# EAGLE board Flipdot_Driver_home (EAGLE 9.2.2)
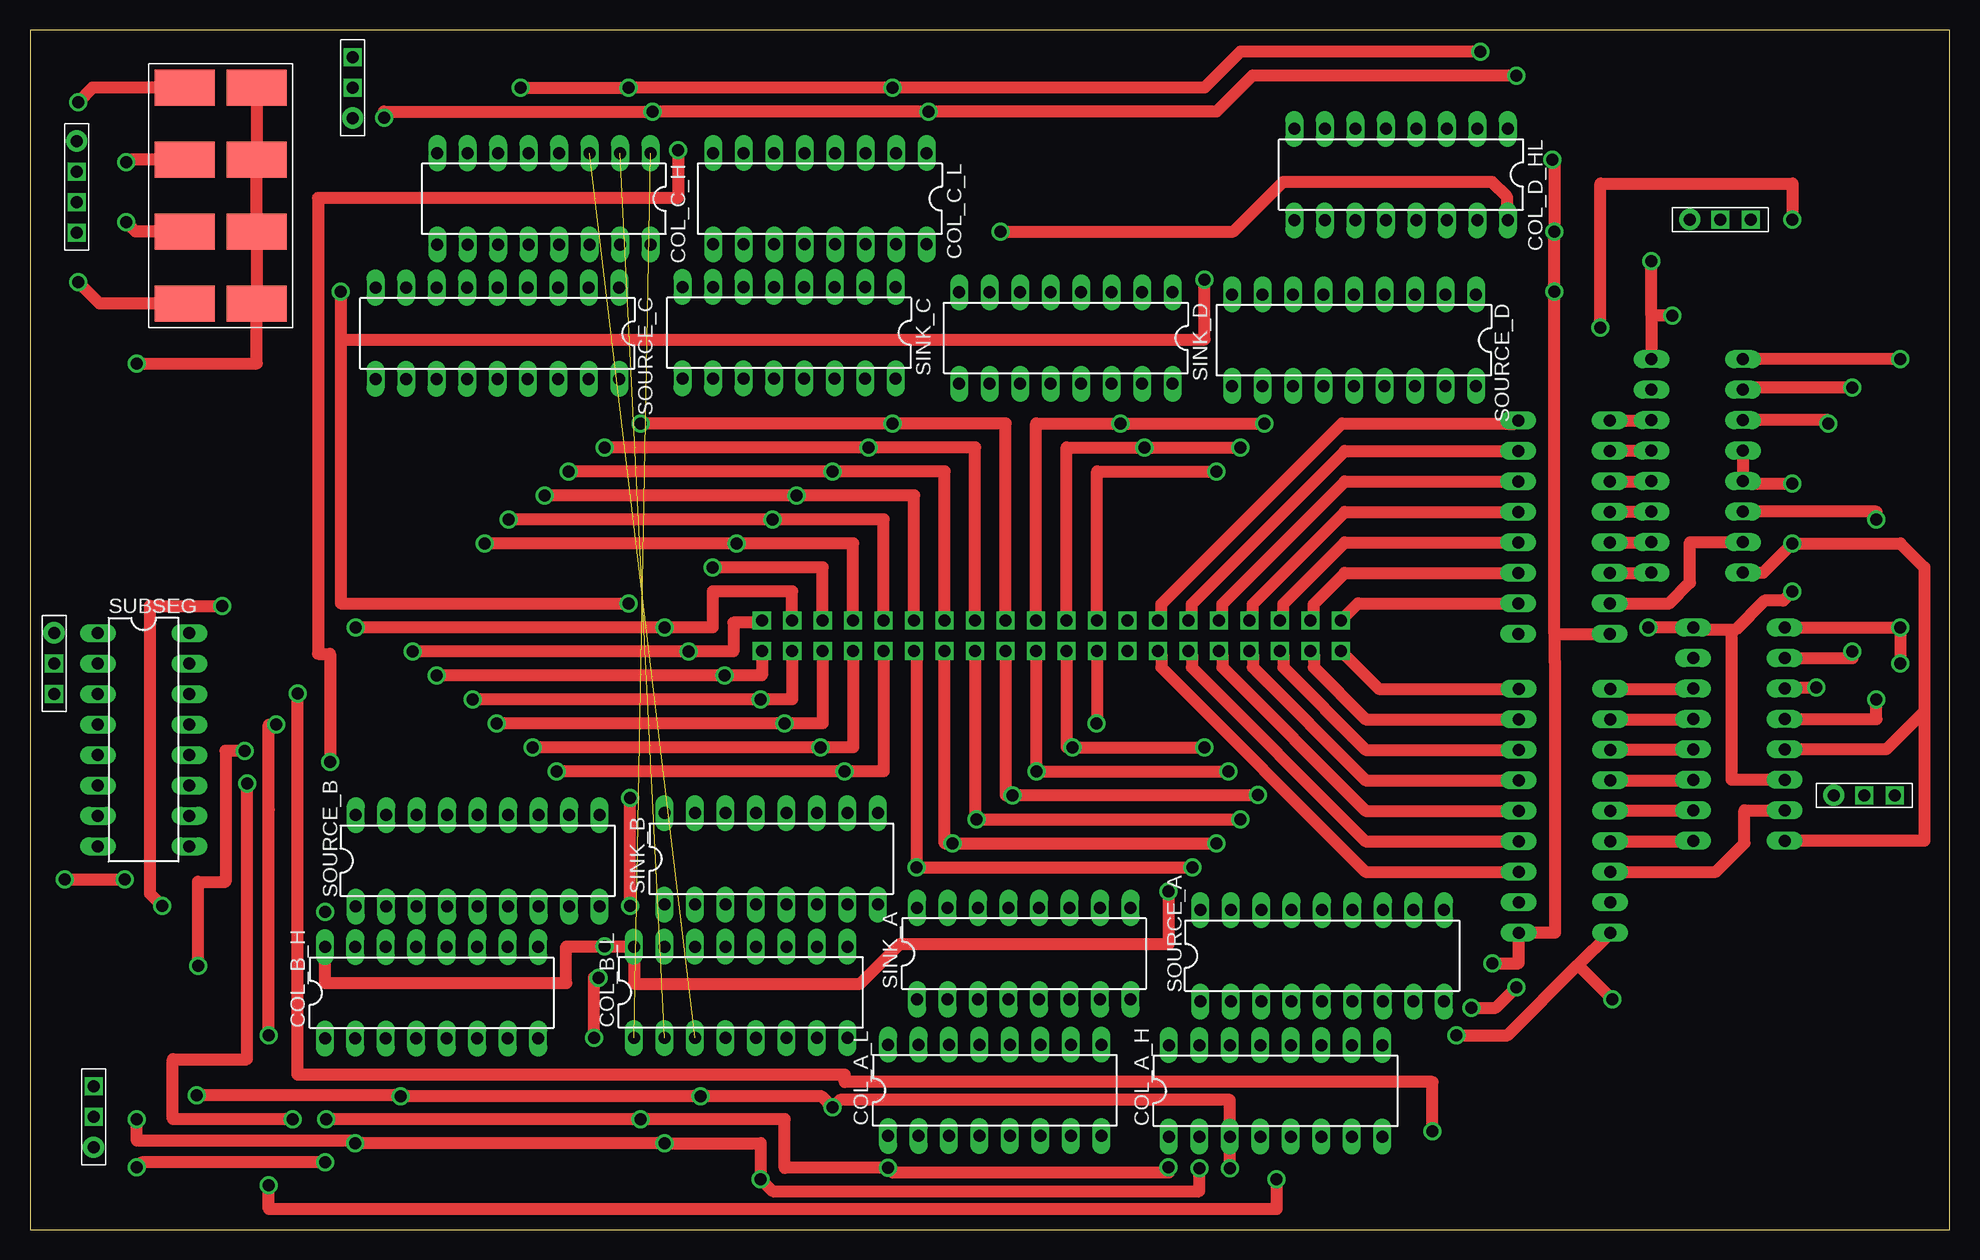
[diagram p0: board, top side]
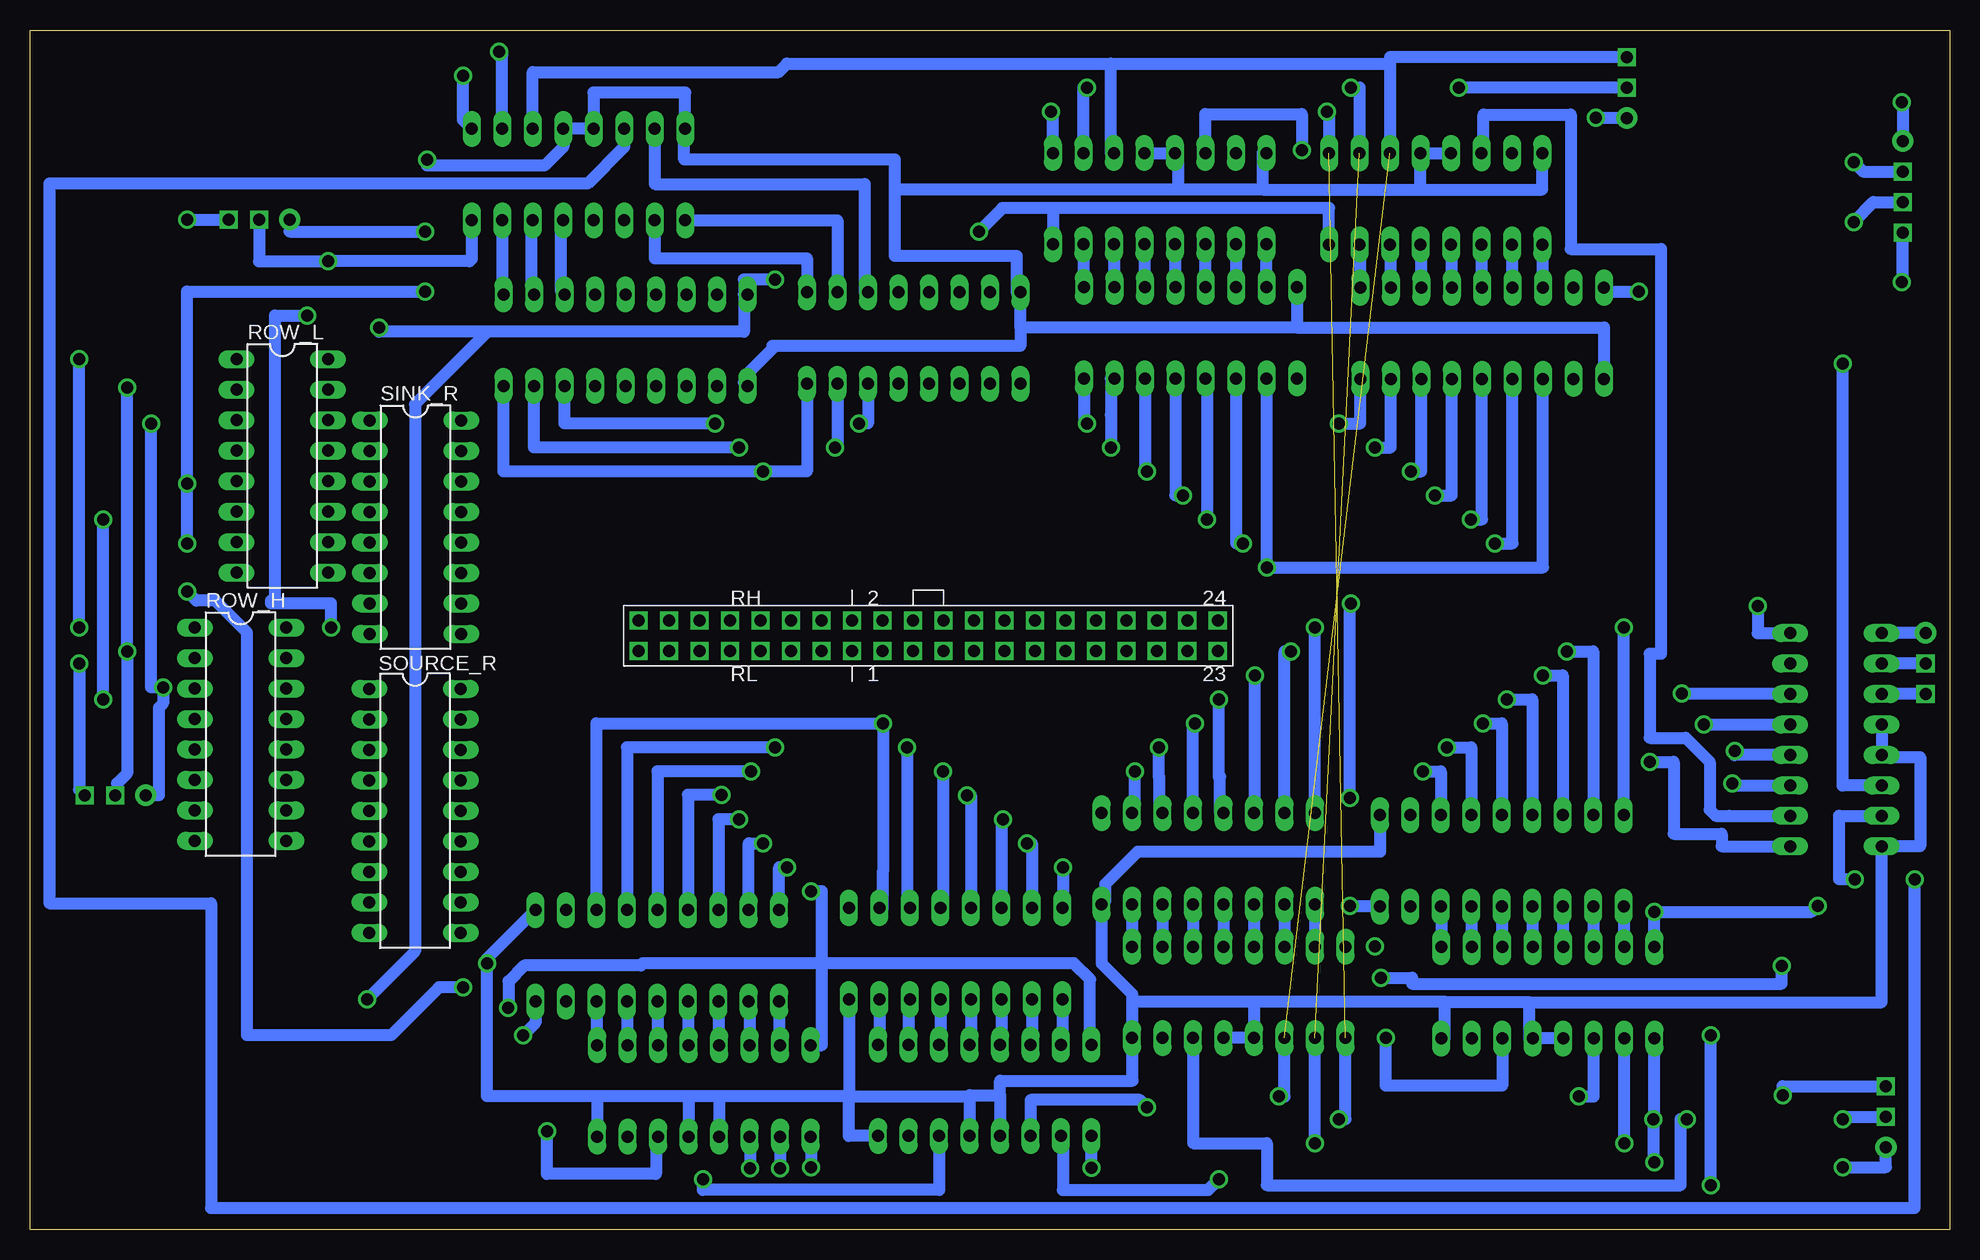
[diagram p1: board, bottom side, seen from below]

Size 160 x 100 mm. Coordinates in mm from the lower left corner, seen from the top.
Outline: 0,0 160,0 160,100 0,100 0,0
Copper layers (1*16): Top 0.035mm / dielectric 1.5mm / Bottom 0.035mm
Design rules "default": minimum track width 0.6mm, minimum drill 1mm, track to track 0.5mm, track to pad 1mm, pad to pad 0.3mm, via to via 1mm, smd to smd 6mil, copper to edge 40mil, drill to drill 1mm, minimum pad ring 10mil, minimum via ring 8mil, stop-mask expansion 4mil, vias tented up to drill 0mil, thermal gap 10mil

## Footprints (pad centres in the part's own frame; a part is rotated, then mirrored left to right if it is on the bottom)
DIL16 = drill 1 long: 1 -8.89,-3.81; 2 -6.35,-3.81; 3 -3.81,-3.81; 4 -1.27,-3.81; 5 1.27,-3.81; 6 3.81,-3.81; 7 6.35,-3.81; 8 8.89,-3.81; 9 8.89,3.81; 10 6.35,3.81; 11 3.81,3.81; 12 1.27,3.81; 13 -1.27,3.81; 14 -3.81,3.81; 15 -6.35,3.81; 16 -8.89,3.81
DIL18 = drill 1 long: 1 -10.16,-3.81; 2 -7.62,-3.81; 3 -5.08,-3.81; 4 -2.54,-3.81; 5 0,-3.81; 6 2.54,-3.81; 7 5.08,-3.81; 8 7.62,-3.81; 9 10.16,-3.81; 10 10.16,3.81; 11 7.62,3.81; 12 5.08,3.81; 13 2.54,3.81; 14 0,3.81; 15 -2.54,3.81; 16 -5.08,3.81; 17 -7.62,3.81; 18 -10.16,3.81
HEADER_40 = drill 1 square: C1 -2.54,-2.54; C2 -2.54,0; C3 0,-2.54; C4 0,0; C5 2.54,-2.54; C6 2.54,0; C7 5.08,-2.54; C8 5.08,0; C9 7.62,-2.54; C10 7.62,0; C11 10.16,-2.54; C12 10.16,0; C13 12.7,-2.54; C14 12.7,0; C15 15.24,-2.54; C16 15.24,0; C17 17.78,-2.54; C18 17.78,0; C19 20.32,-2.54; C20 20.32,0; C21 22.86,-2.54; C22 22.86,0; C23 25.4,-2.54; C24 25.4,0; NC1 -5.08,0; NC2 -5.08,-2.54; R1H -7.62,-2.54; R1L -7.62,0; R2H -10.16,-2.54; R2L -10.16,0; R3H -12.7,-2.54; R3L -12.7,0; R4H -15.24,-2.54; R4L -15.24,0; R5H -17.78,-2.54; R5L -17.78,0; R6H -20.32,-2.54; R6L -20.32,0; R7H -22.86,-2.54; R7L -22.86,0
3_PIN = drill 1 pad 1.778: P$1 -2.54,0 | drill 1 square: P$2 0,0; P$3 2.54,0
JUMPER = smd 3 x 5: S1 -9,-3; S2 -3,-3; S3 3,-3; S4 9,-3; X1 -9,3; X2 -3,3; X3 3,3; X4 9,3
4_PIN = drill 1 pad 1.778: P$1 -2.54,0 | drill 1 square: P$2 0,0; P$3 2.54,0; P$4 5.08,0

## Placement (x,y rotation side)
COL_A_H  74HC238  [DIL16]  103.82,11.55 0 top
COL_A_L  74HC238  [DIL16]  80.41,11.6 0 top
COL_B_H  74HC238  [DIL16]  33.47,19.74 0 top
COL_B_L  74HC238  [DIL16]  59.24,19.77 0 top
COL_C_H  74HC238  [DIL16]  42.83,85.92 180 top
COL_C_L  74HC238  [DIL16]  65.84,85.94 180 top
COL_D_HL  74HC238  [DIL16]  114.28,87.95 180 top
ROW_H  74HC238  [DIL16]  142.44,41.29 270 bottom
ROW_L  74HC238  [DIL16]  138.97,63.65 270 bottom
SINK_A  ULN2003A  [DIL16]  82.85,23 0 top
SINK_B  ULN2003A  [DIL16]  61.78,30.9 0 top
SINK_C  ULN2003A  [DIL16]  63.27,74.76 180 top
SINK_D  ULN2003A  [DIL16]  86.34,74.32 180 top
SINK_R  ULN2003A  [DIL16]  127.87,58.55 270 bottom
SOURCE_A  UDN2981A  [DIL18]  107.7,22.82 0 top
SOURCE_B  UDN2981A  [DIL18]  37.32,30.74 0 top
SOURCE_C  UDN2981A  [DIL18]  38.96,74.71 180 top
SOURCE_D  UDN2981A  [DIL18]  110.36,74.14 180 top
SOURCE_R  UDN2981A  [DIL18]  127.91,34.91 270 bottom
SUBSEG  74HC238  [DIL16]  9.47,40.83 270 top
U$1  HEADER_40  [HEADER_40]  86.4,50.77 0 bottom
U$2  3_PIN  [3_PIN]  5.3,9.4 90 top
U$3  3_PIN  [3_PIN]  2,47.2 270 top
U$4  3_PIN  [3_PIN]  152.9,36.2 0 top
U$5  3_PIN  [3_PIN]  140.9,84.2 0 top
U$6  3_PIN  [3_PIN]  26.9,95.2 90 top
U$10  JUMPER  [JUMPER]  15.9,86.2 270 top
U$11  4_PIN  [4_PIN]  3.9,88.2 270 top

## Library data of the parts
COL_A_H COL_A_L COL_B_H COL_B_L COL_C_H COL_C_L COL_D_HL ROW_H ROW_L SINK_A SINK_B SINK_C SINK_D SINK_R SOURCE_A SOURCE_B SOURCE_C SOURCE_D SOURCE_R SUBSEG U$1-U$6 U$10 U$11 = Flipdot

## Nets
5V: COL_A_H.16 COL_A_L.16 COL_B_H.16 COL_B_L.16 COL_C_H.16 COL_C_L.16 COL_D_HL.16 ROW_H.6 ROW_H.16 ROW_L.16 SUBSEG.16 U$5.P$2
10V: SOURCE_A.9 SOURCE_B.9 SOURCE_C.9 SOURCE_D.9 SOURCE_R.9 U$5.P$3
A: COL_A_H.1 COL_A_L.1 COL_B_H.1 COL_B_L.1 COL_C_H.1 COL_C_L.1 COL_D_HL.1 U$2.P$1 U$6.P$1
B: COL_A_H.2 COL_A_L.2 COL_B_H.2 COL_B_L.2 COL_C_H.2 COL_C_L.2 COL_D_HL.2 U$2.P$2 U$6.P$2
C: COL_A_H.3 COL_A_L.3 COL_B_H.3 COL_B_L.3 COL_C_H.3 COL_C_L.3 COL_D_HL.3 U$2.P$3 U$6.P$3
C1: SINK_A.10 SOURCE_A.12 U$1.C1
C2: SINK_D.16 SOURCE_D.18 U$1.C2
C3: SINK_A.11 SOURCE_A.13 U$1.C3
C4: SINK_D.15 SOURCE_D.17 U$1.C4
C5: SINK_A.12 SOURCE_A.14 U$1.C5
C6: SINK_D.14 SOURCE_D.16 U$1.C6
C7: SINK_A.13 SOURCE_A.15 U$1.C7
C8: SINK_C.16 SOURCE_C.18 U$1.C8
C9: SINK_A.14 SOURCE_A.16 U$1.C9
C10: SINK_C.15 SOURCE_C.17 U$1.C10
C11: SINK_A.15 SOURCE_A.17 U$1.C11
C12: SINK_C.14 SOURCE_C.16 U$1.C12
C13: SINK_A.16 SOURCE_A.18 U$1.C13
C14: SINK_C.13 SOURCE_C.15 U$1.C14
C15: SINK_B.10 SOURCE_B.12 U$1.C15
C16: SINK_C.12 SOURCE_C.14 U$1.C16
C17: SINK_B.11 SOURCE_B.13 U$1.C17
C18: SINK_C.11 SOURCE_C.13 U$1.C18
C19: SINK_B.12 SOURCE_B.14 U$1.C19
C20: SINK_C.10 SOURCE_C.12 U$1.C20
C21: SINK_B.13 SOURCE_B.15 U$1.C21
C22: SINK_B.16 SOURCE_B.18 U$1.C22
C23: SINK_B.14 SOURCE_B.16 U$1.C23
C24: SINK_B.15 SOURCE_B.17 U$1.C24
GND: COL_A_H.4 COL_A_H.5 COL_A_H.8 COL_A_L.4 COL_A_L.5 COL_A_L.8 COL_B_H.4 COL_B_H.5 COL_B_H.8 COL_B_L.4 COL_B_L.5 COL_B_L.8 COL_C_H.4 COL_C_H.5 COL_C_H.8 COL_C_L.4 COL_C_L.5 COL_C_L.8 COL_D_HL.4 COL_D_HL.5 COL_D_HL.8 ROW_H.5 ROW_H.8 ROW_L.4 ROW_L.5 ROW_L.8 SINK_A.8 SINK_B.8 SINK_C.8 SINK_D.8 SINK_R.8 SOURCE_A.10 SOURCE_B.10 SOURCE_C.10 SOURCE_D.10 SOURCE_R.10 SUBSEG.4 SUBSEG.5 SUBSEG.8 U$5.P$1
N$1: U$10.S1 U$11.P$1
N$2: U$10.S2 U$11.P$2
N$3: U$10.S3 U$11.P$3
N$4: SUBSEG.1 U$3.P$1
N$5: SUBSEG.2 U$3.P$2
N$6: SUBSEG.3 U$3.P$3
N$7: COL_A_L.6 SUBSEG.13
N$8: COL_B_H.6 SUBSEG.12
N$9: COL_A_H.6 SUBSEG.14
N$10: COL_B_L.6 SUBSEG.11
N$11: COL_C_H.6 SUBSEG.10
N$12: COL_C_L.6 SUBSEG.9
N$13: COL_D_HL.6 SUBSEG.7
N$14: COL_A_H.15 SOURCE_A.1
N$15: COL_A_H.14 SOURCE_A.2
N$16: COL_A_H.13 SOURCE_A.3
N$17: COL_A_H.12 SOURCE_A.4
N$18: COL_A_H.11 SOURCE_A.5
N$19: COL_A_H.10 SOURCE_A.6
N$20: COL_A_H.9 SOURCE_A.7
N$21: COL_B_H.15 SOURCE_B.1
N$22: COL_B_H.14 SOURCE_B.2
N$23: COL_B_H.13 SOURCE_B.3
N$24: COL_B_H.12 SOURCE_B.4
N$25: COL_B_H.11 SOURCE_B.5
N$26: COL_B_H.10 SOURCE_B.6
N$27: COL_B_H.9 SOURCE_B.7
N$28: COL_C_H.15 SOURCE_C.1
N$29: COL_C_H.14 SOURCE_C.2
N$30: COL_C_H.13 SOURCE_C.3
N$31: COL_C_H.12 SOURCE_C.4
N$32: COL_C_H.11 SOURCE_C.5
N$33: COL_C_H.10 SOURCE_C.6
N$34: COL_C_H.9 SOURCE_C.7
N$35: COL_D_HL.15 SOURCE_D.1
N$36: COL_D_HL.14 SOURCE_D.2
N$37: COL_D_HL.13 SOURCE_D.3
N$38: COL_A_L.15 SINK_A.1
N$39: COL_A_L.14 SINK_A.2
N$40: COL_A_L.13 SINK_A.3
N$41: COL_A_L.12 SINK_A.4
N$42: COL_A_L.11 SINK_A.5
N$43: COL_A_L.10 SINK_A.6
N$44: COL_A_L.9 SINK_A.7
N$45: COL_B_L.15 SINK_B.1
N$46: COL_B_L.14 SINK_B.2
N$47: COL_B_L.13 SINK_B.3
N$48: COL_B_L.12 SINK_B.4
N$49: COL_B_L.11 SINK_B.5
N$50: COL_B_L.10 SINK_B.6
N$51: COL_B_L.9 SINK_B.7
N$52: COL_C_L.15 SINK_C.1
N$53: COL_C_L.14 SINK_C.2
N$54: COL_C_L.13 SINK_C.3
N$55: COL_C_L.12 SINK_C.4
N$56: COL_C_L.11 SINK_C.5
N$57: COL_C_L.10 SINK_C.6
N$58: COL_C_L.9 SINK_C.7
N$59: COL_D_HL.10 SINK_D.1
N$60: COL_D_HL.9 SINK_D.2
N$61: COL_D_HL.7 SINK_D.3
N$62: ROW_H.1 ROW_L.1 U$4.P$3
N$63: ROW_H.2 ROW_L.2 U$4.P$2
N$64: ROW_H.3 ROW_L.3 U$4.P$1
N$65: ROW_H.4 ROW_L.6
N$66: ROW_L.14 SINK_R.1
N$67: ROW_L.13 SINK_R.2
N$68: ROW_L.12 SINK_R.3
N$69: ROW_L.11 SINK_R.4
N$70: ROW_L.10 SINK_R.5
N$71: ROW_L.9 SINK_R.6
N$72: ROW_L.7 SINK_R.7
N$73: ROW_H.14 SOURCE_R.1
N$74: ROW_H.13 SOURCE_R.2
N$75: ROW_H.12 SOURCE_R.3
N$76: ROW_H.11 SOURCE_R.4
N$77: ROW_H.10 SOURCE_R.5
N$78: ROW_H.9 SOURCE_R.6
N$79: ROW_H.7 SOURCE_R.7
N$80: U$10.S4 U$11.P$4
R1H: SOURCE_R.12 U$1.R1H
R1L: SINK_R.16 U$1.R1L
R2H: SOURCE_R.13 U$1.R2H
R2L: SINK_R.15 U$1.R2L
R3H: SOURCE_R.14 U$1.R3H
R3L: SINK_R.14 U$1.R3L
R4H: SOURCE_R.15 U$1.R4H
R4L: SINK_R.13 U$1.R4L
R5H: SOURCE_R.16 U$1.R5H
R5L: SINK_R.12 U$1.R5L
R6H: SOURCE_R.17 U$1.R6H
R6L: SINK_R.11 U$1.R6L
R7H: SOURCE_R.18 U$1.R7H
R7L: SINK_R.10 U$1.R7L
SEG_1: SUBSEG.6 U$10.X1 U$10.X2 U$10.X3 U$10.X4

## Tracks (layer width: path | path; a pad name or v marks a point on that pad's centre or on a via)
5V  (via drill 1)
  Top 1: v94.9,28.2 94.9,23.79 72.49,23.79 69.2,20.5 50.35,20.5 COL_B_L.16 50.35,23.6 v47.9,23.6 44.7,23.6 44.7,20.52 24.58,20.52 COL_B_H.16 | ROW_H.6 141.84,37.48 141.84,50 | 141.84,50 138.63,50 ROW_H.16 138.63,50.2 v134.9,50.2 | v136.9,76.2 135.16,76.2 | 135.16,76.2 ROW_L.16 | 135.16,76.2 v135.16,80.73 | v120.15,18.49 122.19,18.49 v123.9,20.2 | v146.9,53.2 146.14,52.44 144.57,52.44 142.13,50 141.84,50 | v80.9,83.2 100.31,83.2 104.46,87.35 121.87,87.35 123.09,86.13 123.09,84.23 COL_D_HL.16 | v11,27 10,28 10,52 v16,52
  Bottom 1: COL_A_H.16 94,15.36 94,22.2 | 94,22.2 108.9,22.2 109.08,22.02 118.8,22.02 120.12,20.7 120.12,18.52 v120.15,18.49 | COL_A_L.16 71.65,15.53 71.65,20.84 73.01,22.2 94,22.2 | COL_C_H.16 51.72,85.15 74.73,85.15 | 74.73,85.15 COL_C_L.16 | 94,22.2 94,28.2 v94.9,28.2 | COL_D_HL.16 123.17,80.93 123.37,80.73 v135.16,80.73 140.9,80.73 U$5.P$2 | v134.9,50.2 134.9,52.2 139.9,52.2 139.9,52.41 139.56,52.41 139.56,76.2 v136.9,76.2 | v123.9,20.2 125.9,20.2 129.9,16.2 141.9,16.2 141.9,49.77 144.57,52.44 146.14,52.44 v146.9,53.2 | 74.73,85.15 78.95,85.15 v80.9,83.2 | COL_B_H.16 24.58,26.5 v24.6,26.5 11.5,26.5 v11,27 | v16,52 16,49.72 SUBSEG.16
10V  (via drill 1)
  Top 1: v25.9,78.2 25.9,74.2 | v97.9,79.2 97.9,74.2 25.9,74.2 | v118.9,16.2 123.17,16.2 129.03,22.07 | 129.03,22.07 SOURCE_R.9 | v131.9,19.2 129.03,22.07 | v130.9,75.2 130.9,87.2 146.9,87.2 v146.9,84.2 | 25.9,74.2 25.9,52.2 v49.9,52.2 | v50,27 v50,36
  Bottom 1: SOURCE_D.9 100.48,77.95 | 100.48,77.95 100.48,74.85 121.86,74.85 | SOURCE_C.9 28.8,78.2 v25.9,78.2 | v97.9,79.2 100.48,79.2 100.48,77.95 | SOURCE_A.9 117.86,17.23 v118.9,16.2 | 121.86,74.85 127.9,68.81 127.9,23.2 v131.9,19.2 | 121.86,74.85 130.9,74.85 v130.9,75.2 | v146.9,84.2 U$5.P$3 | SOURCE_B.9 49.93,26.93 v50,27 | v50,36 50,52.1 v49.9,52.2
A  (via drill 1)  (1 unrouted)
  Top 1: v123.9,96.2 101.9,96.2 98.9,93.2 v74.9,93.2 v51.9,93.2 29.5,93.2 v29.5,92.7 | v94.9,5.2 94.9,4.73 71.9,4.73 v71.5,5.13 62.9,5.13 62.9,9.2 v50.9,9.2 v24.7,9.2 | v24.6,5.6 9.3,5.6 v8.9,5.2
  Bottom 1: COL_D_HL.1 123.9,92.49 v123.9,96.2 | v51.9,93.2 51.72,93.02 COL_C_H.1 | COL_C_L.1 74.73,93.03 v74.9,93.2 | COL_A_H.1 94.9,7.74 v94.9,5.2 | v71.5,5.13 71.52,5.13 COL_A_L.1 | v50.9,9.2 50.35,9.2 COL_B_L.1 | COL_B_H.1 24.58,9.2 v24.7,9.2 24.7,5.7 v24.6,5.6 | U$6.P$1 29.5,92.66 v29.5,92.7 | v8.9,5.2 5.3,5.2 U$2.P$1
B  (via drill 1)  (1 unrouted)
  Top 1: v120.9,98.2 100.9,98.2 97.9,95.2 v71.9,95.2 v49.9,95.2 v40.9,95.2 | v97.47,5.1 97.47,3.2 61.9,3.2 v60.9,4.2 60.9,7.2 v52.89,7.2 v27.12,7.2 26.92,7.4 8.9,7.4 v8.9,9.2
  Bottom 1: COL_D_HL.2 120.63,97.93 v120.9,98.2 | v49.9,95.2 49.18,95.2 COL_C_H.2 | COL_C_L.2 72.19,95.2 v71.9,95.2 | COL_A_L.2 73.9,7.79 73.9,3.3 61.8,3.3 v60.9,4.2 | COL_A_H.2 v97.47,5.1 | v52.89,7.2 COL_B_L.2 | COL_B_H.2 v27.12,7.2 27.1,7.18 | U$6.P$2 v40.9,95.2 | v8.9,9.2 8.9,9.4 U$2.P$2
C  (via drill 1)  (1 unrouted)
  Top 1: v100,5.1 100,10.8 67.5,10.8 v66.9,10.2 66,11.1 v55.9,11.1 v30.9,11.1 30.9,11.2 v13.9,11.2
  Bottom 1: COL_D_HL.3 118.09,96.5 97.6,96.5 96.9,97.2 69.9,97.2 | 46.64,97.2 COL_C_H.3 | 69.9,97.2 46.64,97.2 | COL_C_L.3 69.9,89.75 69.9,97.2 | COL_A_H.3 v100,5.1 | COL_A_L.3 76.6,10.8 67.5,10.8 v66.9,10.2 | v55.9,11.1 55.43,11.1 COL_B_L.3 | v30.9,11.1 29.66,11.1 COL_B_H.3 | U$6.P$3 46.64,97.74 46.64,97.2 | v13.9,11.2 13.9,11.94 U$2.P$3
C1  (via drill 1)
  Top 1: U$1.C1 88.94,42.2 v88.9,42.2
  Bottom 1: SINK_A.10 88.92,26.81 88.92,29.84 88.9,29.84 v88.9,42.2 112.78,42.2 SOURCE_A.12
C2  (via drill 1)
  Top 1: U$1.C2 88.94,63.2 v98.9,63.2
  Bottom 1: v98.9,63.2 99.9,63.2 | 99.9,63.2 120.53,63.2 SOURCE_D.18 | SINK_D.16 95.23,63.2 99.9,63.2
C3  (via drill 1)
  Top 1: U$1.C3 86.4,40.2 v86.9,40.2 v97.9,40.2
  Bottom 1: v86.9,40.2 86.9,26.81 SINK_A.11 | v97.9,40.2 110.25,40.2 SOURCE_A.13
C4  (via drill 1)
  Top 1: U$1.C4 86.4,65.2 v92.9,65.2 v100.9,65.2
  Bottom 1: v100.9,65.2 117.98,65.2 SOURCE_D.17 | SINK_D.15 92.69,65.2 v92.9,65.2
C5  (via drill 1)
  Top 1: U$1.C5 83.86,38.2 v83.9,38.2 v99.9,38.2
  Bottom 1: v83.9,38.2 83.9,26.81 SINK_A.12 | v99.9,38.2 107.7,38.2 SOURCE_A.14
C6  (via drill 1)
  Top 1: U$1.C6 83.86,67.2 v90.9,67.2 v102.9,67.2
  Bottom 1: v102.9,67.2 115.44,67.2 SOURCE_D.16 | SINK_D.14 90.15,67.2 v90.9,67.2
C7  (via drill 1)
  Top 1: U$1.C7 81.32,36.2 v81.9,36.2 81.94,36.23 v102.35,36.23
  Bottom 1: v81.9,36.2 81.58,36.2 SINK_A.13 | SOURCE_A.15 105.17,36.23 v102.35,36.23
C8  (via drill 1)
  Top 1: U$1.C8 81.32,67.2 v71.9,67.2 v50.9,67.2
  Bottom 1: SINK_C.16 72.16,67.2 v71.9,67.2 | v50.9,67.2 49.12,67.2 SOURCE_C.18
C9  (via drill 1)
  Top 1: U$1.C9 78.78,34.2 v78.9,34.2 v100.9,34.2
  Bottom 1: v78.9,34.2 79.04,34.2 SINK_A.14 | v100.9,34.2 102.62,34.2 SOURCE_A.16
C10  (via drill 1)
  Top 1: U$1.C10 78.78,65.2 v69.9,65.2 v47.9,65.2
  Bottom 1: SINK_C.15 69.9,70.95 69.9,67.93 v69.9,65.2 | v47.9,65.2 46.58,65.2 SOURCE_C.17
C11  (via drill 1)
  Top 1: v98.9,32.2 v76.9,32.2 76.24,32.2 U$1.C11
  Bottom 1: v76.9,32.2 76.5,32.2 SINK_A.15 | SOURCE_A.17 100.08,32.2 v98.9,32.2
C12  (via drill 1)
  Top 1: U$1.C12 76.24,63.2 v66.9,63.2 v44.9,63.2
  Bottom 1: SINK_C.14 67.08,63.2 v66.9,63.2 | v44.9,63.2 44.04,63.2 SOURCE_C.16
C13  (via drill 1)
  Top 1: U$1.C13 73.9,48.03 v73.9,30.2 v96.9,30.2
  Bottom 1: v73.9,30.2 73.9,26.87 SINK_A.16 | SOURCE_A.18 97.55,30.2 v96.9,30.2
C14  (via drill 1)
  Top 1: U$1.C14 73.7,61.2 v63.9,61.2 v42.9,61.2
  Bottom 1: SINK_C.13 64.54,61.2 v63.9,61.2 | v42.9,61.2 41.5,61.2 SOURCE_C.15
C15  (via drill 1)
  Top 1: U$1.C15 71.16,38.2 v67.9,38.2 v43.9,38.2
  Bottom 1: SINK_B.10 67.9,34.71 v67.9,38.2 | v43.9,38.2 42.4,38.2 SOURCE_B.12
C16  (via drill 1)
  Top 1: U$1.C16 71.16,59.2 v61.9,59.2 v39.9,59.2
  Bottom 1: SINK_C.12 61.9,70.95 v61.9,59.2 | v39.9,59.2 38.96,59.2 SOURCE_C.14
C17  (via drill 1)
  Top 1: U$1.C17 68.62,40.2 v65.9,40.2 v41.9,40.2
  Bottom 1: SINK_B.11 65.87,34.71 65.87,37.74 65.9,37.74 v65.9,40.2 | v41.9,40.2 39.86,40.2 SOURCE_B.13
C18  (via drill 1)
  Top 1: U$1.C18 68.62,57.2 v58.9,57.2 v37.9,57.2
  Bottom 1: SINK_C.11 59.46,57.2 v58.9,57.2 | v37.9,57.2 36.42,57.2 SOURCE_C.13
C19  (via drill 1)
  Top 1: U$1.C19 66.08,42.2 v62.9,42.2 v38.9,42.2
  Bottom 1: SINK_B.12 63.05,42.2 v62.9,42.2 | v38.9,42.2 37.32,42.2 SOURCE_B.14
C20  (via drill 1)
  Top 1: U$1.C20 66.08,55.2 v56.9,55.2
  Bottom 1: SINK_C.10 56.92,55.2 v56.9,55.2 33.88,55.2 SOURCE_C.12
C21  (via drill 1)
  Top 1: U$1.C21 63.54,44.2 v60.9,44.2 v36.9,44.2
  Bottom 1: SINK_B.13 60.79,34.71 60.79,37.74 60.9,37.74 v60.9,44.2 | v36.9,44.2 34.78,44.2 SOURCE_B.15
C22  (via drill 1)
  Top 1: U$1.C22 63.54,53.2 56.9,53.2 56.9,50.2 v52.9,50.2 v27.16,50.2
  Bottom 1: SINK_B.16 v52.9,50.2 | SOURCE_B.18 v27.16,50.2
C23  (via drill 1)
  Top 1: U$1.C23 61,46.2 v57.9,46.2 v33.9,46.2
  Bottom 1: SINK_B.14 57.9,34.71 v57.9,46.2 | v33.9,46.2 32.24,46.2 SOURCE_B.16
C24  (via drill 1)
  Top 1: U$1.C24 61,50.59 58.64,50.59 58.64,48.2 v54.9,48.2 v31.9,48.2
  Bottom 1: SINK_B.15 55.44,48.2 v54.9,48.2 | v31.9,48.2 29.7,48.2 SOURCE_B.17
GND  (via drill 1)
  Top 1: v121.9,22.2 124.09,22.2 SOURCE_R.10 127.12,24.75 127.12,47.33 127.08,47.33 127.08,49.66 | 127.08,49.66 SINK_R.8 | ROW_L.4 ROW_L.5 142.78,62.2 v146.9,62.2 | 143.14,54.76 ROW_L.8 144.46,54.76 v146.9,57.2 155.9,57.2 157.9,55.2 157.9,43.2 | 157.9,43.2 154.72,40.02 ROW_H.5 | ROW_H.8 157.9,32.4 157.9,43.2 | 127.08,49.66 127.08,78.19 v127.07,78.2 v127.07,83.2 127.07,89.03 v126.9,89.2
  Bottom 1: 117.9,26.63 SOURCE_A.10 121.9,22.59 v121.9,22.2 121.9,11.11 112.71,11.11 | COL_A_L.8 91.74,7.79 91.74,11.11 | 102.55,11.11 105.09,11.11 | 105.09,11.11 COL_A_H.5 | 91.74,11.11 81.68,11.11 | 79.14,11.21 81.68,11.21 81.68,11.11 | 79.14,11.21 COL_A_L.4 | COL_C_L.4 COL_C_L.5 64.3,89.75 64.3,86.72 | 57.23,86.72 57.23,89.75 COL_C_L.8 | 64.3,86.72 57.23,86.72 | 44.1,86.71 57.23,86.71 57.23,86.72 | 44.1,86.71 COL_C_H.4 COL_C_H.5 | 44.1,86.71 33.94,86.71 COL_C_H.8 | SINK_C.8 54.38,75.2 | SOURCE_C.10 28.8,75.2 54.38,75.2 | 54.38,75.2 77.45,75.2 | 77.45,75.2 SINK_D.8 77.73,78.13 77.73,81.16 87.9,81.16 87.9,86.72 | 77.45,75.2 77.45,73.65 97.9,73.65 | 97.9,73.65 98.12,73.65 | 87.9,86.72 87.9,89.2 105.47,89.2 105.47,91.76 COL_D_HL.8 105.38,91.78 105.38,94.77 113.03,94.77 113.03,91.76 COL_D_HL.5 COL_D_HL.4 115.54,91.75 115.54,90.27 117.11,88.7 126.9,88.7 v126.9,89.2 | 87.9,86.72 64.3,86.72 | COL_B_H.4 COL_B_H.5 35.02,15.93 35.02,18.95 | COL_B_H.8 42.09,15.93 42.09,18.95 | 57.97,18.98 42.09,18.98 42.09,18.95 | COL_B_L.5 COL_B_L.4 57.97,18.98 | 102.55,11.11 COL_A_H.4 | 112.71,11.11 COL_A_H.8 | 97.9,73.65 100.2,71.35 SOURCE_D.10 100.49,70.62 | v146.9,57.2 v146.9,62.2 146.9,78.2 v127.07,78.2 | 81.68,11.11 COL_A_L.5 | U$5.P$1 138.36,83.2 v127.07,83.2 | SUBSEG.4 SUBSEG.5 5.66,39.38 2.45,39.38 2.45,31.94 SUBSEG.8 5.66,18.95 35.02,18.95 | SOURCE_B.10 47.48,31.5 67.67,31.5 70.39,28.78 70.39,27.38 SINK_B.8 70.67,22.18 68.13,19.64 68.13,19 | 79.14,11.21 79.14,12.4 68.1,12.4 68.1,15.96 COL_B_L.8 68.13,19 | 91.74,11.11 | 91.74,11.11 102.55,11.11 | SINK_A.8 91.74,11.11 | 35.02,18.95 42.09,18.95 | 105.09,11.11 112.71,11.11
  Bottom 1: 57.97,18.98 57.97,19 68.13,19
N$1  (via drill 1)
  Top 1: U$10.S1 5.2,95.2 v4,94
  Bottom 1: v4,94 3.9,93.9 U$11.P$1
N$2  (via drill 1)
  Top 1: U$10.S2 8.2,89.2 v8,89
  Bottom 1: v8,89 7.2,88.2 U$11.P$2
N$3  (via drill 1)
  Top 1: U$10.S3 8.8,83.2 v8,84
  Bottom 1: v8,84 6.34,85.66 U$11.P$3
N$4
  Bottom 1: U$3.P$1 2,49.72 SUBSEG.1
N$5
  Bottom 1: U$3.P$2 2,47.18 SUBSEG.2
N$6
  Bottom 1: U$3.P$3 5.66,44.66 SUBSEG.3
N$7  (via drill 1)
  Top 1: v103.9,4.2 103.9,1.7 19.9,1.7 v19.9,3.7 | v19.9,16.2 19.9,35 19.9,42.1 v20.5,42.1
  Bottom 1: COL_A_L.6 84.22,3.3 103.9,3.3 v103.9,4.2 | v20.5,42.1 SUBSEG.13 | v19.9,3.7 v19.9,16.2
N$8  (via drill 1)
  Top 1: v17.9,39.9 16.3,39.9 16.3,29 14,29 v14,22 | v47,16 47,21 v47.4,21
  Bottom 1: SUBSEG.12 17.9,39.56 v17.9,39.9 | COL_B_H.6 37.28,12 47,12 v47,16 | v47.4,21 44.8,21 44.8,20.5 14,20.5 v14,22
N$9  (via drill 1)
  Top 1: v116.9,8.2 116.9,12.3 67.9,12.3 67.9,12.9 22.3,12.9 v22.3,44.7
  Bottom 1: COL_A_H.6 107.82,7.74 107.82,4.63 116.9,4.63 v116.9,8.2 | v22.3,44.7 13.28,44.7 SUBSEG.14
N$10  (via drill 1)
  Top 1: v21.9,9.2 11.9,9.2 11.9,14.2 18.1,14.2 v18.1,37.2
  Bottom 1: COL_B_L.6 63.05,7.2 56.9,7.2 56.9,3.7 22.4,3.7 22.4,9.2 v21.9,9.2 | v18.1,37.2 18.1,37.02 SUBSEG.11
N$11
  Bottom 1: COL_C_H.6 38.83,89.73 38.83,92.94 31.58,92.94 31.58,81.73 24.05,81.73 24.05,68.2 24.05,48 25,48 25,41 22,41 20,39 20,35 19.5,34.5 18.38,34.5 18.36,34.48 SUBSEG.10
N$12  (via drill 1)
  Top 1: v54,90 54,86 24,86 24,48 25,48 v25,39
  Bottom 1: COL_C_L.6 62.03,93 54,93 v54,90 | v25,39 23,39 23,33 19,33 19,31.94 SUBSEG.9
N$13  (via drill 1)
  Top 1: v2.9,29.2 v7.9,29.2
  Bottom 1: COL_D_HL.6 110.46,91.75 110.46,90.27 113.53,87.2 158.38,87.2 158.38,27.2 144.9,27.2 144.9,1.8 19.9,1.8 2.9,1.8 v2.9,29.2 | v7.9,29.2 9.2,29.2 9.2,34.48 SUBSEG.7
N$14
  Bottom 1: SOURCE_A.1 97.55,15.36 COL_A_H.15
N$15
  Bottom 1: SOURCE_A.2 100.01,19.01 COL_A_H.14
N$16
  Bottom 1: SOURCE_A.3 102.62,15.36 COL_A_H.13
N$17
  Bottom 1: SOURCE_A.4 105.17,15.36 COL_A_H.12
N$18
  Bottom 1: SOURCE_A.5 107.7,15.36 COL_A_H.11
N$19
  Bottom 1: SOURCE_A.6 110.25,15.36 COL_A_H.10
N$20
  Bottom 1: SOURCE_A.7 112.78,15.36 COL_A_H.9
N$21
  Bottom 1: SOURCE_B.1 27.16,23.58 COL_B_H.15
N$22
  Bottom 1: SOURCE_B.2 29.7,23.58 COL_B_H.14
N$23
  Bottom 1: SOURCE_B.3 32.24,23.58 COL_B_H.13
N$24
  Bottom 1: SOURCE_B.4 34.78,23.58 COL_B_H.12
N$25
  Bottom 1: SOURCE_B.5 37.32,23.58 COL_B_H.11
N$26
  Bottom 1: SOURCE_B.6 39.86,23.58 COL_B_H.10
N$27
  Bottom 1: SOURCE_B.7 42.36,26.89 COL_B_H.9
N$28
  Bottom 1: SOURCE_C.1 49.12,82.05 COL_C_H.15
N$29
  Bottom 1: SOURCE_C.2 46.58,82.05 COL_C_H.14
N$30
  Bottom 1: SOURCE_C.3 44.04,82.05 COL_C_H.13
N$31
  Bottom 1: SOURCE_C.4 41.5,82.05 COL_C_H.12
N$32
  Bottom 1: SOURCE_C.5 38.96,82.05 COL_C_H.11
N$33
  Bottom 1: SOURCE_C.6 36.42,82.05 COL_C_H.10
N$34
  Bottom 1: SOURCE_C.7 33.88,82.05 COL_C_H.9
N$35
  Bottom 1: COL_D_HL.15 120.63,78.06 SOURCE_D.1
N$36
  Bottom 1: COL_D_HL.14 118.19,84.05 118.19,78.16 SOURCE_D.2
N$37
  Bottom 1: SOURCE_D.3 115.73,78.24 115.73,83.96 COL_D_HL.13
N$38
  Bottom 1: SINK_A.1 73.96,15.41 COL_A_L.15
N$39
  Bottom 1: SINK_A.2 76.5,15.41 COL_A_L.14
N$40
  Bottom 1: SINK_A.3 79.04,15.41 COL_A_L.13
N$41
  Bottom 1: SINK_A.4 81.58,15.41 COL_A_L.12
N$42
  Bottom 1: SINK_A.5 84.12,15.41 COL_A_L.11
N$43
  Bottom 1: SINK_A.6 86.76,19.19 COL_A_L.10
N$44
  Bottom 1: SINK_A.7 89.2,15.41 COL_A_L.9
N$45
  Bottom 1: SINK_B.1 COL_B_L.15
N$46
  Bottom 1: SINK_B.2 COL_B_L.14
N$47
  Bottom 1: SINK_B.3 COL_B_L.13
N$48
  Bottom 1: SINK_B.4 COL_B_L.12
N$49
  Bottom 1: SINK_B.5 COL_B_L.11
N$50
  Bottom 1: SINK_B.6 COL_B_L.10
N$51
  Bottom 1: SINK_B.7 COL_B_L.9
N$52
  Bottom 1: COL_C_L.15 72.19,78.61 SINK_C.1
N$53
  Bottom 1: SINK_C.2 69.62,82.09 COL_C_L.14
N$54
  Bottom 1: COL_C_L.13 67.11,78.61 SINK_C.3
N$55
  Bottom 1: SINK_C.4 64.54,82.09 COL_C_L.12
N$56
  Bottom 1: SINK_C.5 62,82.09 COL_C_L.11
N$57
  Bottom 1: COL_C_L.10 59.49,78.61 SINK_C.6
N$58
  Bottom 1: SINK_C.7 56.92,82.09 COL_C_L.9
N$59
  Bottom 1: COL_D_HL.10 107.93,80.98 95.23,80.98 SINK_D.1
N$60
  Bottom 1: COL_D_HL.9 92.69,84.14 SINK_D.2
N$61
  Bottom 1: COL_D_HL.7 107.93,87.17 90.43,87.17 90.43,78.13 SINK_D.3
N$62  (via drill 1)
  Top 1: ROW_H.1 v155.9,50.18 v155.9,47.2 | v155.9,72.54 ROW_L.1
  Bottom 1: v155.9,50.18 v155.9,72.54 | v155.9,47.2 155.9,36.66 U$4.P$3
N$63  (via drill 1)
  Top 1: ROW_H.2 151.9,47.64 v151.9,48.2 | v151.9,70.2 142.78,70.2 ROW_L.2
  Bottom 1: v151.9,70.2 v151.9,48.2 151.9,38.04 152.75,37.19 152.75,36.35 U$4.P$2
N$64  (via drill 1)
  Top 1: ROW_H.3 146.25,45.2 v148.9,45.2 | v149.9,67.2 149.9,67.46 ROW_L.3
  Bottom 1: v149.9,67.2 149.9,45.2 v148.9,45.2 148.9,43.86 149.26,43.5 149.26,36.2 U$4.P$1
N$65  (via drill 1)
  Top 1: ROW_H.4 153.9,42.56 v153.9,44.2 | v153.9,59.2 153.9,59.84 ROW_L.6
  Bottom 1: v153.9,44.2 v153.9,59.2
N$66
  Top 1: SINK_R.1 135.13,67.44 ROW_L.14
N$67
  Top 1: SINK_R.2 131.7,64.92 ROW_L.13
N$68
  Top 1: SINK_R.3 135.13,62.36 ROW_L.12
N$69
  Top 1: SINK_R.4 131.7,59.84 ROW_L.11
N$70
  Top 1: SINK_R.5 135.13,57.28 ROW_L.10
N$71
  Top 1: SINK_R.6 135.13,54.74 ROW_L.9
N$72
  Top 1: SINK_R.7 136.65,52.2 138.37,53.92 138.37,57.3 ROW_L.7
N$73
  Top 1: SOURCE_R.1 138.6,45.07 ROW_H.14
N$74
  Top 1: SOURCE_R.2 138.6,42.53 ROW_H.13
N$75
  Top 1: SOURCE_R.3 131.75,40.02 ROW_H.12
N$76
  Top 1: SOURCE_R.4 138.6,37.45 ROW_H.11
N$77
  Top 1: SOURCE_R.5 131.75,34.94 ROW_H.10
N$78
  Top 1: SOURCE_R.6 138.6,32.37 ROW_H.9
N$79
  Top 1: SOURCE_R.7 140.53,29.83 142.9,32.2 142.9,34.94 ROW_H.7
N$80  (via drill 1)
  Top 1: U$10.S4 5.8,77.2 v4,79
  Bottom 1: v4,79 3.9,79.1 U$11.P$4
R1H
  Top 1: U$1.R1H 94.31,47.94 94.31,46.85 111.33,29.83 SOURCE_R.12
R1L
  Top 1: U$1.R1L 94.31,51.06 94.31,52.15 109.37,67.21 123.83,67.21 SINK_R.16
R2H
  Top 1: U$1.R2H 96.85,47.94 96.85,46.85 111.33,32.37 SOURCE_R.13
R2L
  Top 1: U$1.R2L 96.85,51.06 96.85,52.15 109.6,64.9 SINK_R.15
R3H
  Top 1: U$1.R3H 99.39,47.94 99.39,46.85 111.33,34.91 SOURCE_R.14
R3L
  Top 1: U$1.R3L 99.39,51.06 99.39,52.15 109.6,62.36 SINK_R.14
R4H
  Top 1: U$1.R4H 101.93,47.94 101.93,46.85 111.33,37.45 SOURCE_R.15
R4L
  Top 1: U$1.R4L 101.93,51.06 101.93,52.15 109.6,59.82 SINK_R.13
R5H
  Top 1: U$1.R5H 104.47,47.94 104.47,46.85 111.33,39.99 SOURCE_R.16
R5L
  Top 1: U$1.R5L 104.47,51.06 104.47,52.15 109.6,57.28 SINK_R.12
R6H
  Top 1: U$1.R6H 107.01,47.94 107.01,46.85 111.33,42.53 SOURCE_R.17
R6L
  Top 1: U$1.R6L 107.01,51.06 107.01,52.15 109.6,54.74 SINK_R.11
R7H
  Top 1: U$1.R7H 112.42,45.07 SOURCE_R.18
R7L
  Top 1: U$1.R7L 110.69,52.2 SINK_R.10
SEG_1  (via drill 1)
  Top 1: U$10.X1 U$10.X2 U$10.X3 U$10.X4 18.9,72.2 v8.9,72.2
  Bottom 1: SUBSEG.6 8.9,37.02 v8.9,72.2